# Altium PCB PCB1.PcbDoc
Units mm, origin at the board's own origin, x right, y up, seen from the top; angles counter-clockwise.
Board outline 100.28 x 100.25 mm, 2 copper layers (Top Layer, Bottom Layer); 197 components, 18 nets, 472 pads, 90 vias.
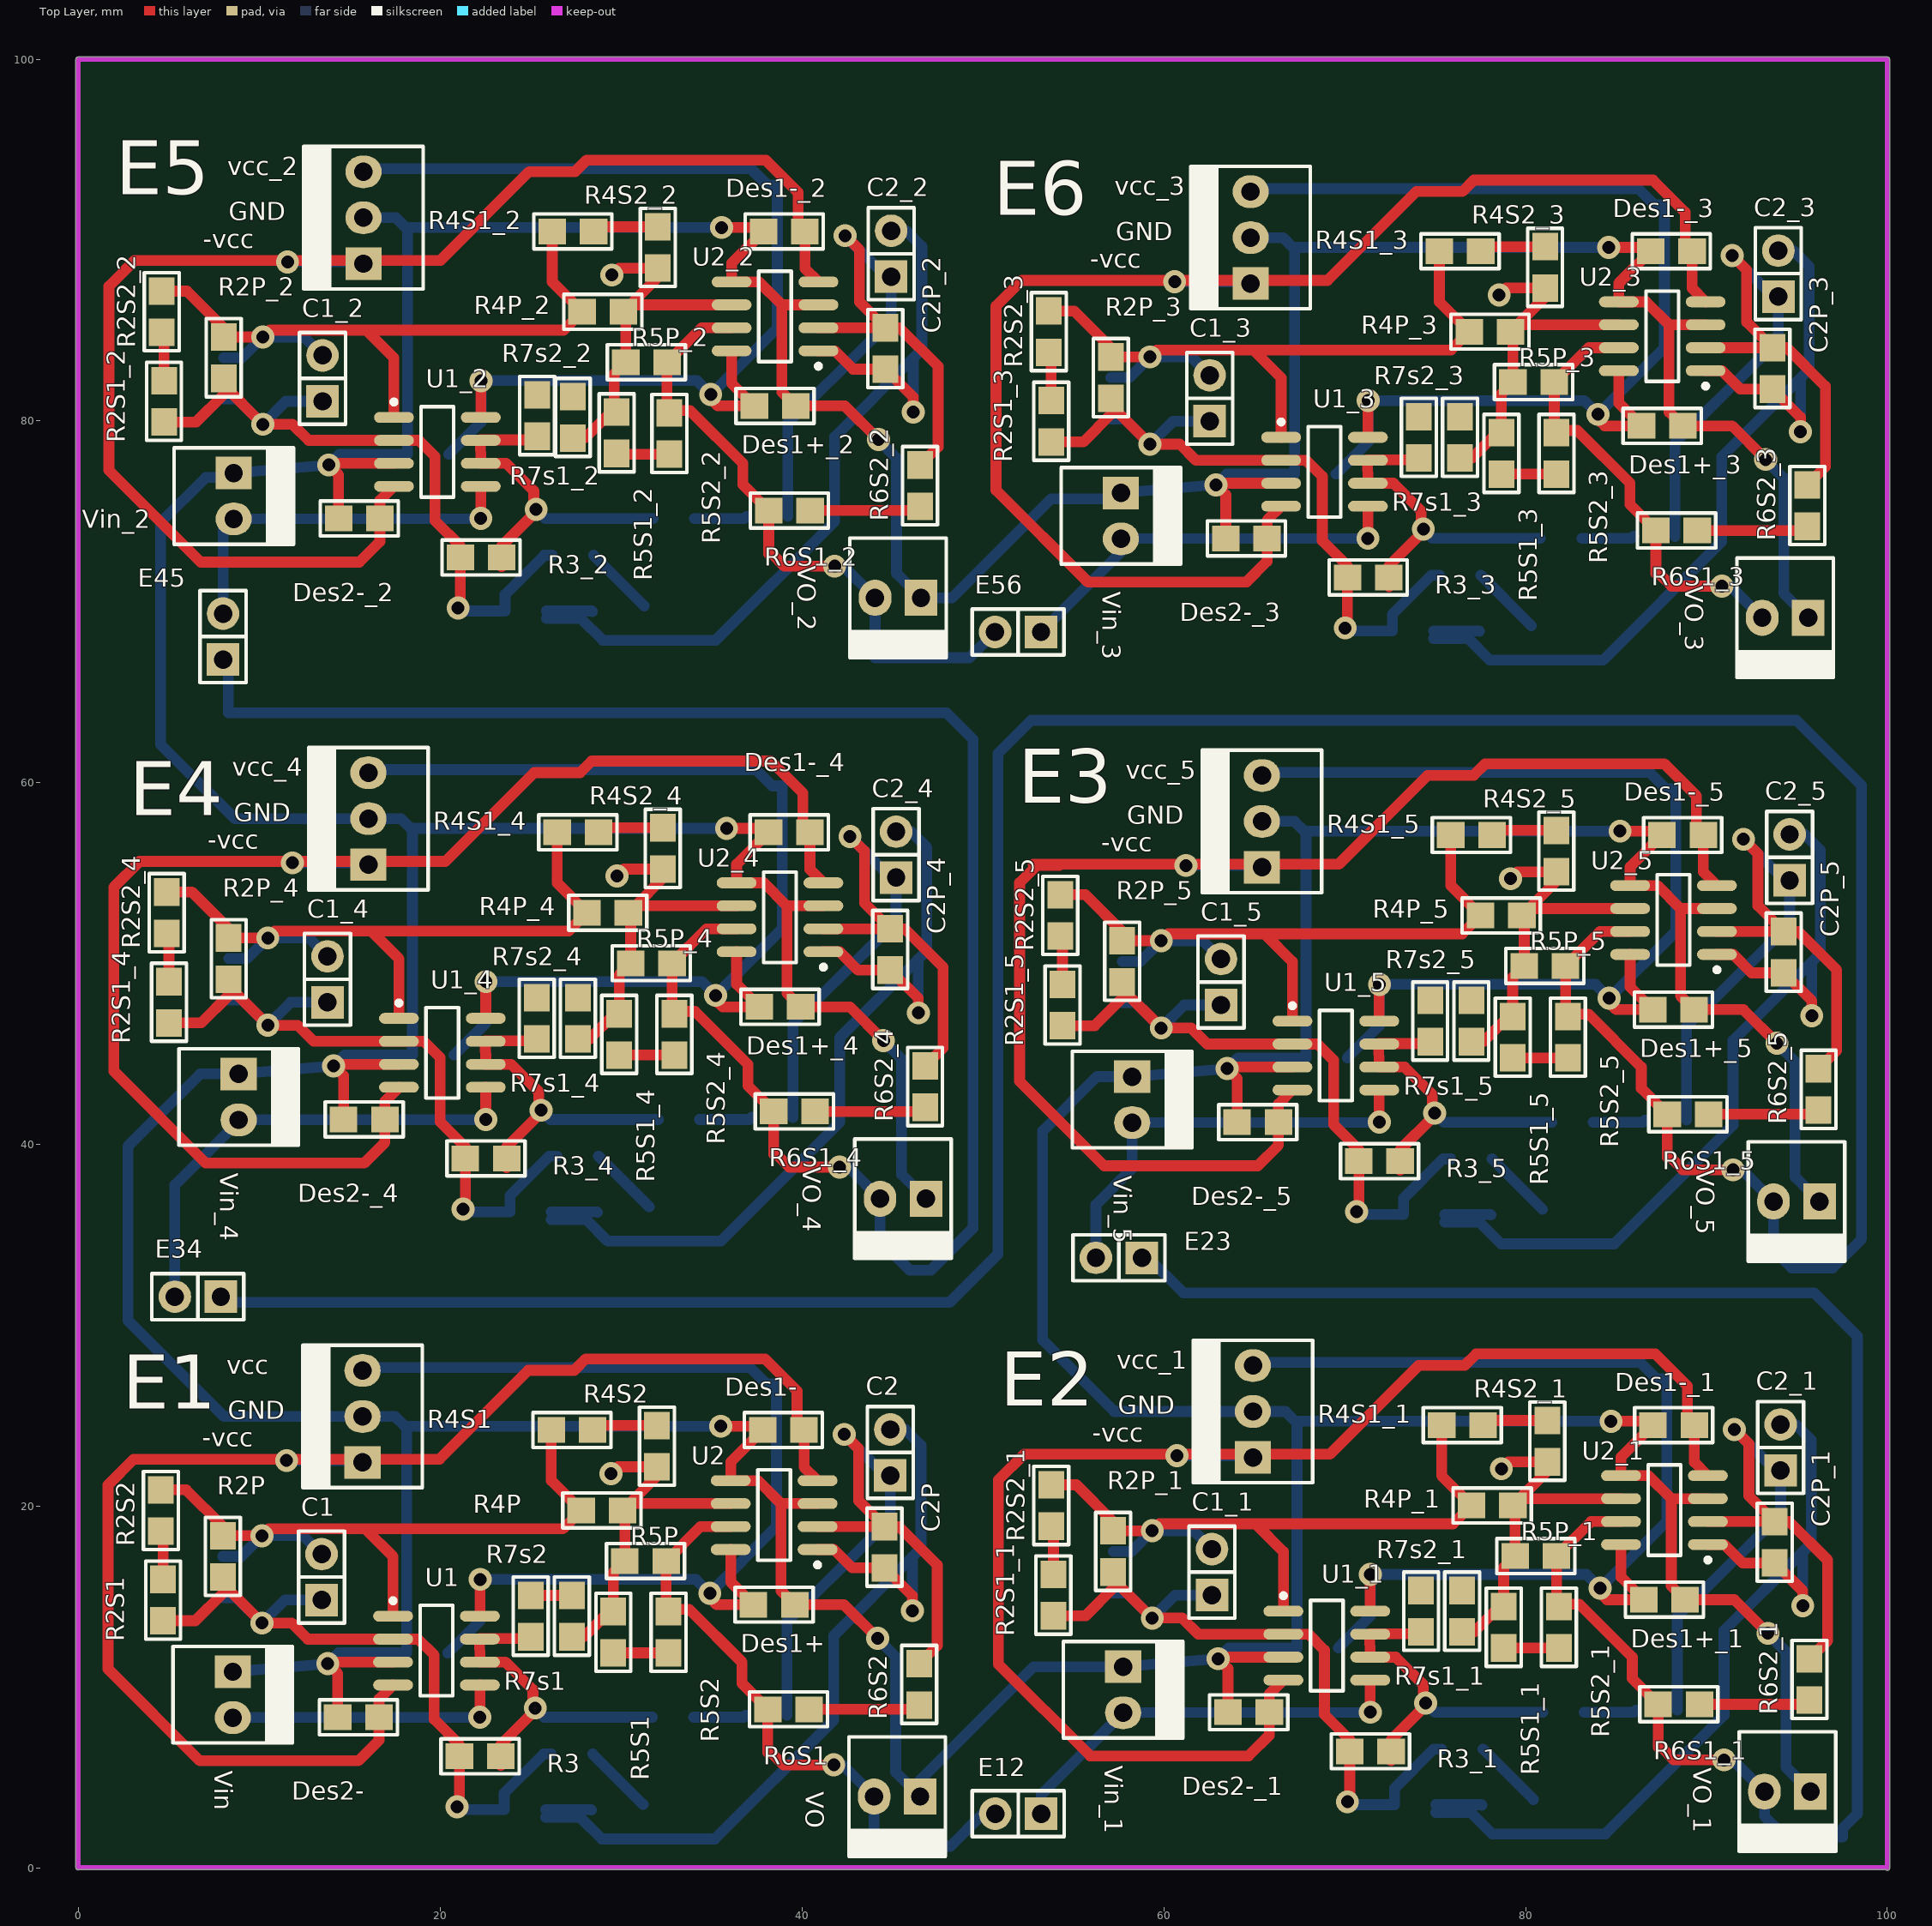
[diagram p0: Top Layer view]
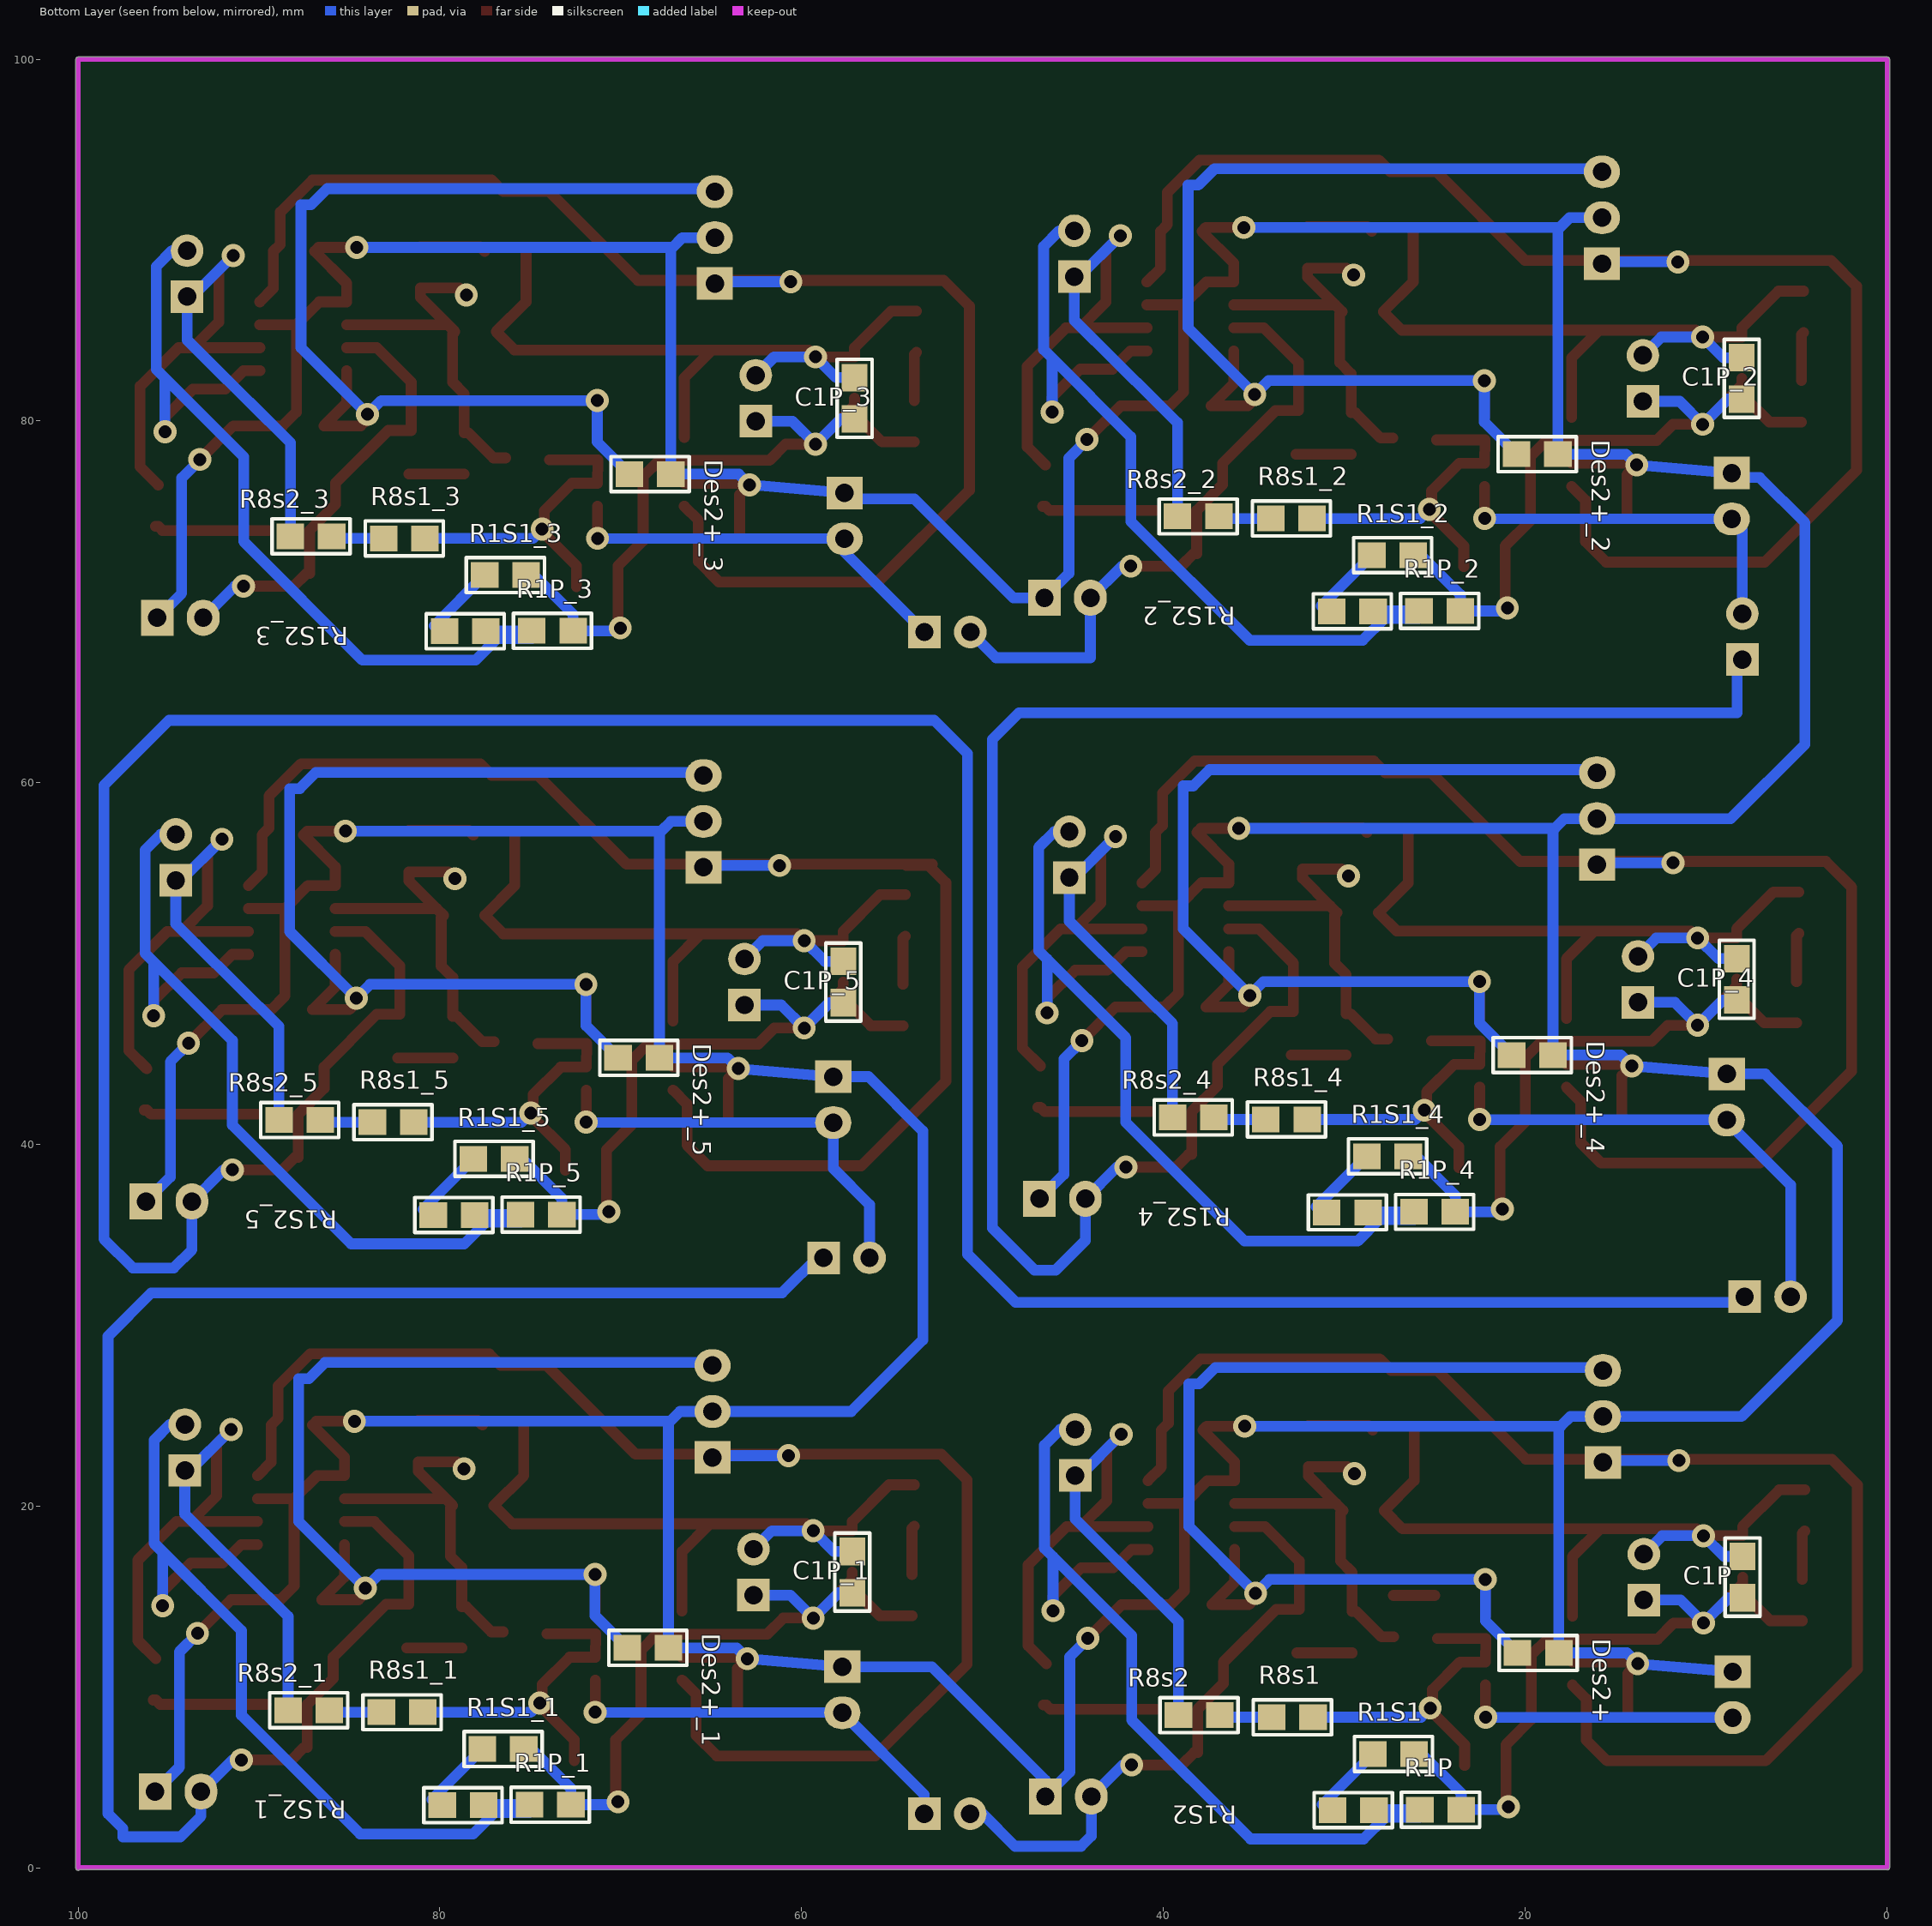
[diagram p1: Bottom Layer view, seen from below]
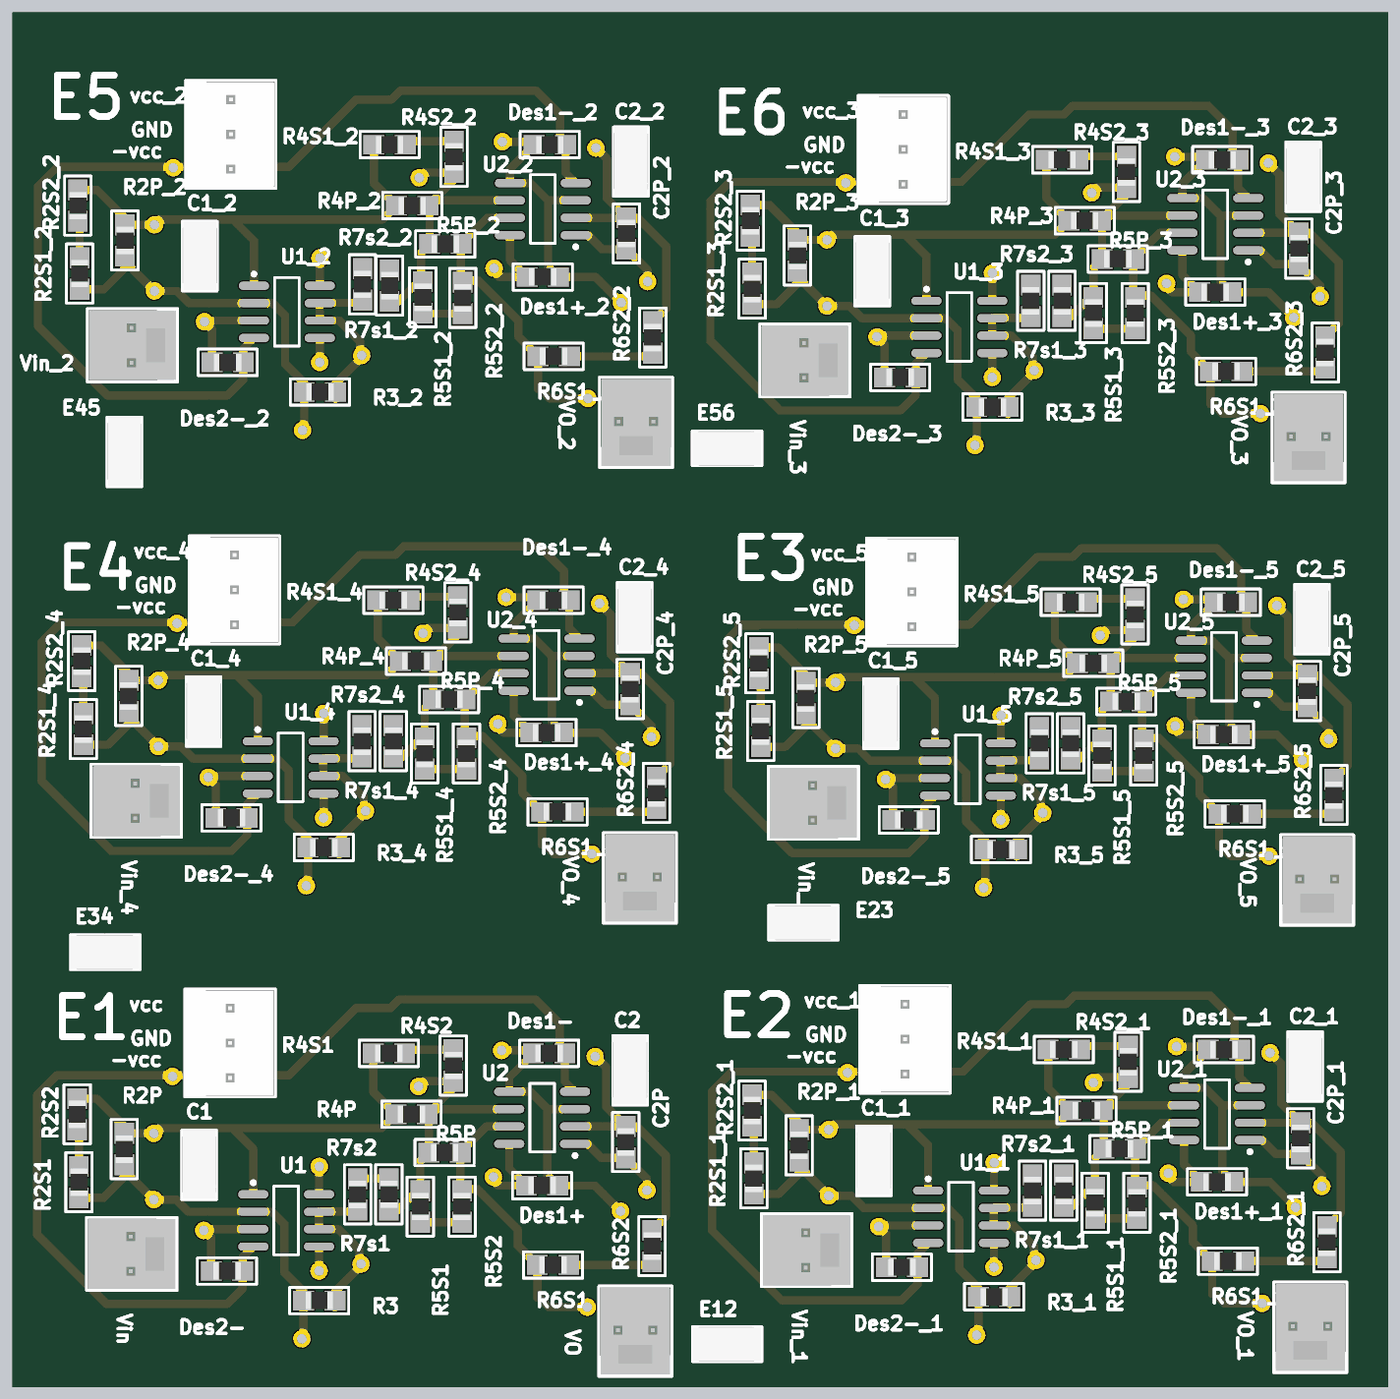
[diagram p2: 3D render of the assembled board from above, using the file's embedded part models]
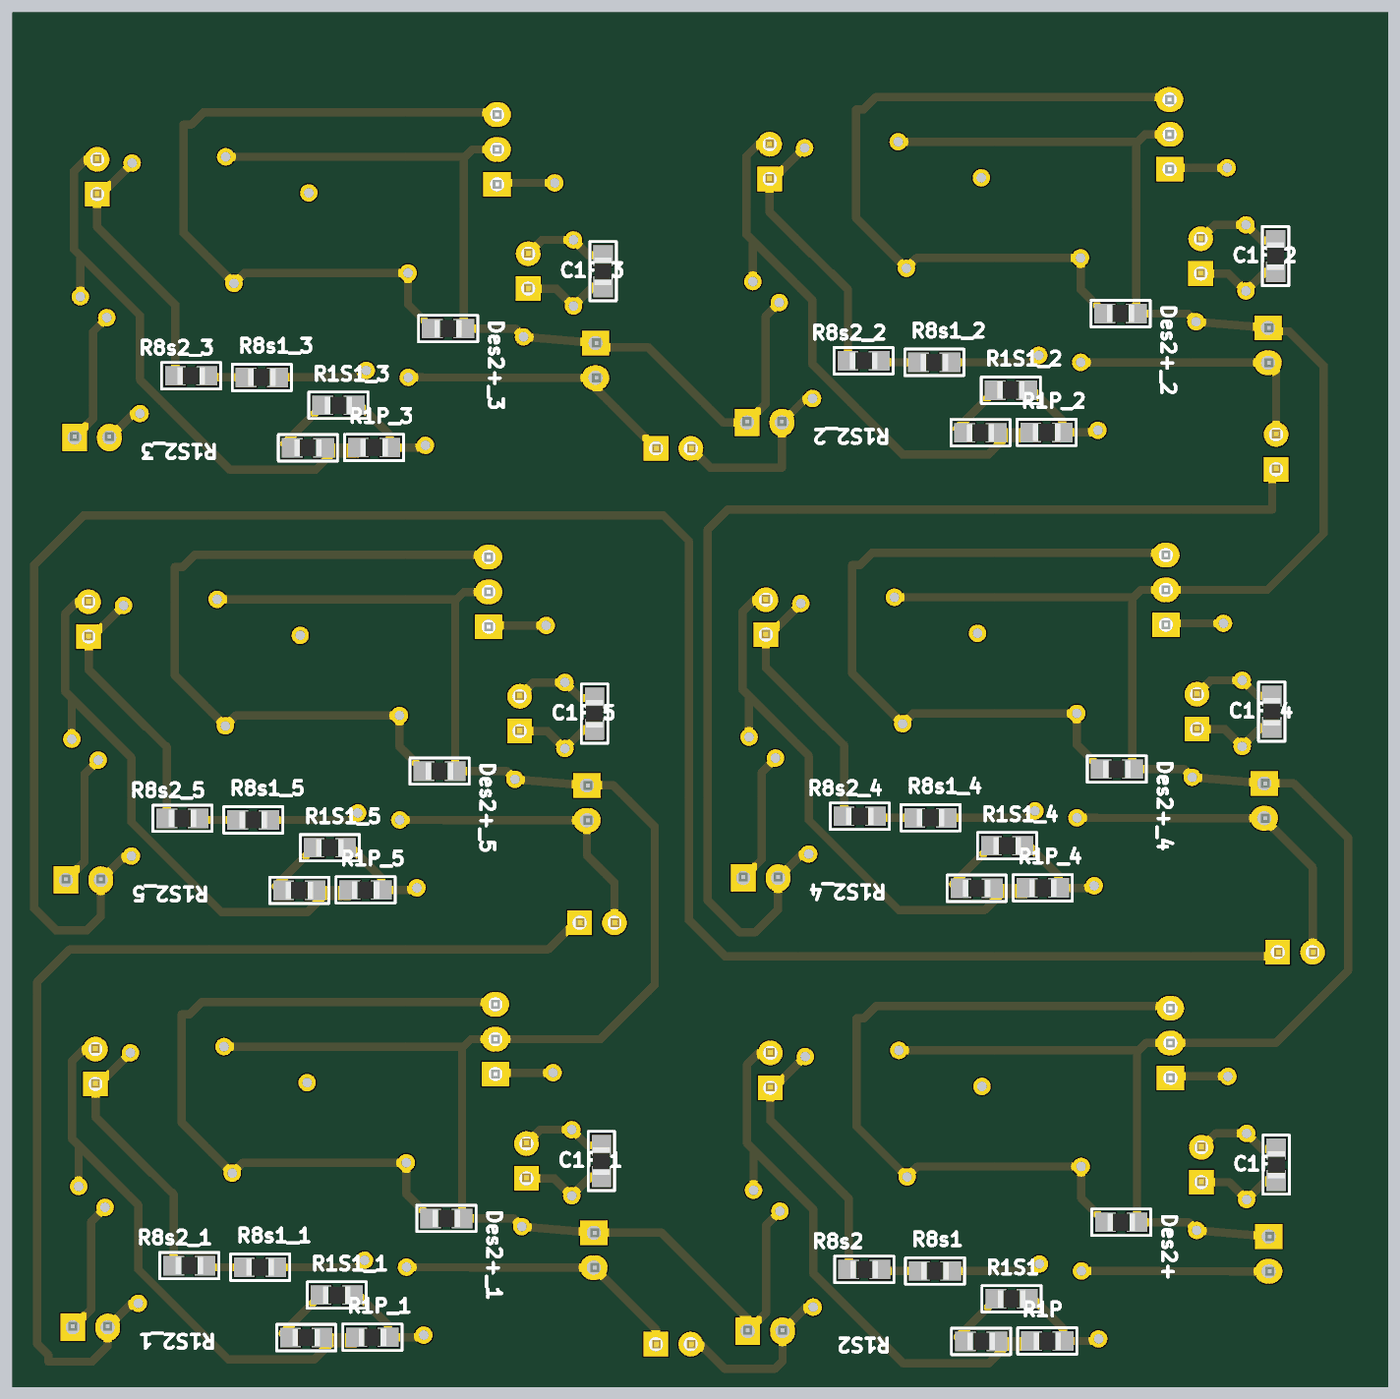
[diagram p3: 3D render of the assembled board from below, using the file's embedded part models]

## Layer stack, top to bottom
Top Solder: solder mask 0.0102, Solder Resist, Dk 3.5
Top Layer: signal copper 0.0356
Dielectric 1: dielectric 0.32, FR-4, Dk 4.8
Bottom Layer: signal copper 0.0356
Bottom Solder: solder mask 0.0102, Solder Resist, Dk 3.5

## Board outline
-0.152,0.025 -0.152,100 cw(c-0.025,100) -0.025,100.127 100,100.127 cw(c100,100) 100.127,100 100.127,0 cw(c100,0) 99.918,-0.097 0.03,-0.097 cw(c0.03,0.03) 0.013,-0.096 cw(c-0.025,0.025)

## Design rules (kind name [scope] priority, off if disabled: settings)
Clearance [All] p1: gap=0.254
PolygonConnect [All] p1: connectstyle=Relief reliefconductorwidth=0.254 reliefentries=4 polygonreliefangle="90 Angle" airgapwidth=0.254
RoutingVias [All] p1: holewidth=0.711 width=1.27 viastyle="Through Hole" minholewidth=0.711 minwidth=1.27 maxholewidth=0.711 maxwidth=1.27
SolderMaskExpansion [All] p1: expansion=0.102
Width [All] p1: maxlimit=0.6 minlimit=0.3 preferedwidth=0.4
30 further rules are at their usual default settings.

## Classes and differential pairs
component class Sheet1: C1 C1P C2 C2P Des1+ Des1- Des2+ Des2- R1P R1S1 R1S2 R2P R2S1 R2S2 R3 R4P R4S1 R4S2 R5P R5S1 R5S2 R6S1 R6S2 R7s1 R7s2 R8s1 R8s2 U1 U2 vcc Vin VO

## Components (designator, comment, footprint, x,y, rotation, side; value= is the part's Value field where it differs from the comment)
C1 "JUMPER" JUMPER2 13.436,16.083 r90 top
C1_1 "JUMPER" JUMPER2 62.661,16.358 r90 top (schematic designator C1)
C1_2 "JUMPER" JUMPER2 13.486,82.358 r90 top (schematic designator C1)
C1_3 "JUMPER" JUMPER2 62.536,81.258 r90 top (schematic designator C1)
C1_4 "JUMPER" JUMPER2 13.761,49.133 r90 top (schematic designator C1)
C1_5 "JUMPER" JUMPER2 63.161,48.983 r90 top (schematic designator C1)
C1P "CAP" 0805 7.975,16.083 r90 bottom
C1P_1 "CAP" 0805 57.2,16.358 r90 bottom (schematic designator C1P)
C1P_2 "CAP" 0805 8.025,82.358 r90 bottom (schematic designator C1P)
C1P_3 "CAP" 0805 57.075,81.258 r90 bottom (schematic designator C1P)
C1P_4 "CAP" 0805 8.3,49.133 r90 bottom (schematic designator C1P)
C1P_5 "CAP" 0805 57.7,48.983 r90 bottom (schematic designator C1P)
C2 "JUMPER" JUMPER2 44.875,22.975 r90 top
C2_1 "JUMPER" JUMPER2 94.1,23.25 r90 top (schematic designator C2)
C2_2 "JUMPER" JUMPER2 44.925,89.25 r90 top (schematic designator C2)
C2_3 "JUMPER" JUMPER2 93.975,88.15 r90 top (schematic designator C2)
C2_4 "JUMPER" JUMPER2 45.2,56.025 r90 top (schematic designator C2)
C2_5 "JUMPER" JUMPER2 94.6,55.875 r90 top (schematic designator C2)
C2P "CAP" 0805 44.551,17.734 r270 top
C2P_1 "CAP" 0805 93.776,18.009 r270 top (schematic designator C2P)
C2P_2 "CAP" 0805 44.601,84.009 r270 top (schematic designator C2P)
C2P_3 "CAP" 0805 93.651,82.909 r270 top (schematic designator C2P)
C2P_4 "CAP" 0805 44.876,50.784 r270 top (schematic designator C2P)
C2P_5 "CAP" 0805 94.276,50.634 r270 top (schematic designator C2P)
Des1+ "10n" 0805 38.455,14.559 r0 top
Des1+_1 "10n" 0805 87.68,14.834 r0 top (schematic designator Des1+)
Des1+_2 "10n" 0805 38.505,80.834 r0 top (schematic designator Des1+)
Des1+_3 "10n" 0805 87.555,79.734 r0 top (schematic designator Des1+)
Des1+_4 "10n" 0805 38.78,47.609 r0 top (schematic designator Des1+)
Des1+_5 "10n" 0805 88.18,47.459 r0 top (schematic designator Des1+)
Des1- "10n" 0805 38.963,24.211 r180 top
Des1-_1 "10n" 0805 88.188,24.486 r180 top (schematic designator Des1-)
Des1-_2 "10n" 0805 39.013,90.486 r180 top (schematic designator Des1-)
Des1-_3 "10n" 0805 88.063,89.386 r180 top (schematic designator Des1-)
Des1-_4 "10n" 0805 39.288,57.261 r180 top (schematic designator Des1-)
Des1-_5 "10n" 0805 88.688,57.111 r180 top (schematic designator Des1-)
Des2+ "10n" 0805 19.278,11.892 r180 bottom
Des2+_1 "10n" 0805 68.503,12.167 r180 bottom (schematic designator Des2+)
Des2+_2 "10n" 0805 19.328,78.167 r180 bottom (schematic designator Des2+)
Des2+_3 "10n" 0805 68.378,77.067 r180 bottom (schematic designator Des2+)
Des2+_4 "10n" 0805 19.603,44.942 r180 bottom (schematic designator Des2+)
Des2+_5 "10n" 0805 69.003,44.792 r180 bottom (schematic designator Des2+)
Des2- "10n" 0805 15.468,8.336 r180 top
Des2-_1 "10n" 0805 64.693,8.611 r180 top (schematic designator Des2-)
Des2-_2 "10n" 0805 15.518,74.611 r180 top (schematic designator Des2-)
Des2-_3 "10n" 0805 64.568,73.511 r180 top (schematic designator Des2-)
Des2-_4 "10n" 0805 15.793,41.386 r180 top (schematic designator Des2-)
Des2-_5 "10n" 0805 65.193,41.236 r180 top (schematic designator Des2-)
E12 "JUMPER" JUMPER2 51.95,3 r180 top (schematic designator C1)
E23 "JUMPER" JUMPER2 57.517,33.736 r180 top (schematic designator C1)
E34 "JUMPER" JUMPER2 6.592,31.586 r180 top (schematic designator C1)
E45 "JUMPER" JUMPER2 7.986,68.083 r90 top (schematic designator C1)
E56 "JUMPER" JUMPER2 51.942,68.336 r180 top (schematic designator C1)
R1P "270" 0805 24.675,3.225 r0 bottom
R1P_1 "270" 0805 73.9,3.5 r0 bottom (schematic designator R1P)
R1P_2 "270" 0805 24.725,69.5 r0 bottom (schematic designator R1P)
R1P_3 "270" 0805 73.775,68.4 r0 bottom (schematic designator R1P)
R1P_4 "270" 0805 25,36.275 r0 bottom (schematic designator R1P)
R1P_5 "270" 0805 74.4,36.125 r0 bottom (schematic designator R1P)
R1S1 "220" 0805 27.279,6.304 r0 bottom
R1S1_1 "220" 0805 76.504,6.579 r0 bottom (schematic designator R1S1)
R1S1_2 "220" 0805 27.329,72.579 r0 bottom (schematic designator R1S1)
R1S1_3 "220" 0805 76.379,71.479 r0 bottom (schematic designator R1S1)
R1S1_4 "220" 0805 27.604,39.354 r0 bottom (schematic designator R1S1)
R1S1_5 "220" 0805 77.004,39.204 r0 bottom (schematic designator R1S1)
R1S2 "RES" 0805 29.5,3.2 r180 bottom
R1S2_1 "RES" 0805 78.725,3.475 r180 bottom (schematic designator R1S2)
R1S2_2 "RES" 0805 29.55,69.475 r180 bottom (schematic designator R1S2)
R1S2_3 "RES" 0805 78.6,68.375 r180 bottom (schematic designator R1S2)
R1S2_4 "RES" 0805 29.825,36.25 r180 bottom (schematic designator R1S2)
R1S2_5 "RES" 0805 79.225,36.1 r180 bottom (schematic designator R1S2)
R2P "RES" 0805 7.975,17.226 r90 top
R2P_1 "RES" 0805 57.2,17.501 r90 top (schematic designator R2P)
R2P_2 "RES" 0805 8.025,83.501 r90 top (schematic designator R2P)
R2P_3 "RES" 0805 57.075,82.401 r90 top (schematic designator R2P)
R2P_4 "RES" 0805 8.3,50.276 r90 top (schematic designator R2P)
R2P_5 "RES" 0805 57.7,50.126 r90 top (schematic designator R2P)
R2S1 "1.5K" 0805 4.673,14.813 r90 top
R2S1_1 "1.5K" 0805 53.898,15.088 r90 top (schematic designator R2S1)
R2S1_2 "1.5K" 0805 4.723,81.088 r90 top (schematic designator R2S1)
R2S1_3 "1.5K" 0805 53.773,79.988 r90 top (schematic designator R2S1)
R2S1_4 "1.5K" 0805 4.998,47.863 r90 top (schematic designator R2S1)
R2S1_5 "1.5K" 0805 54.398,47.713 r90 top (schematic designator R2S1)
R2S2 "47" 0805 4.546,19.766 r90 top
R2S2_1 "47" 0805 53.771,20.041 r90 top (schematic designator R2S2)
R2S2_2 "47" 0805 4.596,86.041 r90 top (schematic designator R2S2)
R2S2_3 "47" 0805 53.646,84.941 r90 top (schematic designator R2S2)
R2S2_4 "47" 0805 4.871,52.816 r90 top (schematic designator R2S2)
R2S2_5 "47" 0805 54.271,52.666 r90 top (schematic designator R2S2)
R3 "47K" 0805 22.199,6.177 r180 top
R3_1 "47K" 0805 71.424,6.452 r180 top (schematic designator R3)
R3_2 "47K" 0805 22.249,72.452 r180 top (schematic designator R3)
R3_3 "47K" 0805 71.299,71.352 r180 top (schematic designator R3)
R3_4 "47K" 0805 22.524,39.227 r180 top (schematic designator R3)
R3_5 "47K" 0805 71.924,39.077 r180 top (schematic designator R3)
R4P "RES" 0805 28.93,19.766 r0 top
R4P_1 "RES" 0805 78.155,20.041 r0 top (schematic designator R4P)
R4P_2 "RES" 0805 28.98,86.041 r0 top (schematic designator R4P)
R4P_3 "RES" 0805 78.03,84.941 r0 top (schematic designator R4P)
R4P_4 "RES" 0805 29.255,52.816 r0 top (schematic designator R4P)
R4P_5 "RES" 0805 78.655,52.666 r0 top (schematic designator R4P)
R4S1 "1.5K" 0805 27.279,24.211 r0 top
R4S1_1 "1.5K" 0805 76.504,24.486 r0 top (schematic designator R4S1)
R4S1_2 "1.5K" 0805 27.329,90.486 r0 top (schematic designator R4S1)
R4S1_3 "1.5K" 0805 76.379,89.386 r0 top (schematic designator R4S1)
R4S1_4 "1.5K" 0805 27.604,57.261 r0 top (schematic designator R4S1)
R4S1_5 "1.5K" 0805 77.004,57.111 r0 top (schematic designator R4S1)
R4S2 "47" 0805 31.978,23.322 r270 top
R4S2_1 "47" 0805 81.203,23.597 r270 top (schematic designator R4S2)
R4S2_2 "47" 0805 32.028,89.597 r270 top (schematic designator R4S2)
R4S2_3 "47" 0805 81.078,88.497 r270 top (schematic designator R4S2)
R4S2_4 "47" 0805 32.303,56.372 r270 top (schematic designator R4S2)
R4S2_5 "47" 0805 81.703,56.222 r270 top (schematic designator R4S2)
R5P "RES" 0805 31.343,16.972 r0 top
R5P_1 "RES" 0805 80.568,17.247 r0 top (schematic designator R5P)
R5P_2 "RES" 0805 31.393,83.247 r0 top (schematic designator R5P)
R5P_3 "RES" 0805 80.443,82.147 r0 top (schematic designator R5P)
R5P_4 "RES" 0805 31.668,50.022 r0 top (schematic designator R5P)
R5P_5 "RES" 0805 81.068,49.872 r0 top (schematic designator R5P)
R5S1 "1.2K" 0805 29.565,13.035 r270 top
R5S1_1 "1.2K" 0805 78.79,13.31 r270 top (schematic designator R5S1)
R5S1_2 "1.2K" 0805 29.75,79.35 r270 top (schematic designator R5S1)
R5S1_3 "1.2K" 0805 78.665,78.21 r270 top (schematic designator R5S1)
R5S1_4 "1.2K" 0805 29.89,46.085 r270 top (schematic designator R5S1)
R5S1_5 "1.2K" 0805 79.29,45.935 r270 top (schematic designator R5S1)
R5S2 "33K" 0805 32.613,13.035 r90 top
R5S2_1 "33K" 0805 81.838,13.31 r90 top (schematic designator R5S2)
R5S2_2 "33K" 0805 32.663,79.31 r90 top (schematic designator R5S2)
R5S2_3 "33K" 0805 81.713,78.21 r90 top (schematic designator R5S2)
R5S2_4 "33K" 0805 32.938,46.085 r90 top (schematic designator R5S2)
R5S2_5 "33K" 0805 82.338,45.935 r90 top (schematic designator R5S2)
R6S1 "RES" 0805 39.25,8.775 r0 top
R6S1_1 "RES" 0805 88.475,9.05 r0 top (schematic designator R6S1)
R6S1_2 "RES" 0805 39.3,75.05 r0 top (schematic designator R6S1)
R6S1_3 "RES" 0805 88.35,73.95 r0 top (schematic designator R6S1)
R6S1_4 "RES" 0805 39.575,41.825 r0 top (schematic designator R6S1)
R6S1_5 "RES" 0805 88.975,41.675 r0 top (schematic designator R6S1)
R6S2 "56K" 0805 46.475,10.15 r90 top
R6S2_1 "56K" 0805 95.7,10.425 r90 top (schematic designator R6S2)
R6S2_2 "56K" 0805 46.525,76.425 r90 top (schematic designator R6S2)
R6S2_3 "56K" 0805 95.575,75.325 r90 top (schematic designator R6S2)
R6S2_4 "56K" 0805 46.8,43.2 r90 top (schematic designator R6S2)
R6S2_5 "56K" 0805 96.2,43.05 r90 top (schematic designator R6S2)
R7s1 "47K" 0805 25,13.925 r90 top
R7s1_1 "47K" 0805 74.225,14.2 r90 top (schematic designator R7s1)
R7s1_2 "47K" 0805 25.35,80.3 r90 top (schematic designator R7s1)
R7s1_3 "47K" 0805 74.1,79.1 r90 top (schematic designator R7s1)
R7s1_4 "47K" 0805 25.325,46.975 r90 top (schematic designator R7s1)
R7s1_5 "47K" 0805 74.725,46.825 r90 top (schematic designator R7s1)
R7s2 "RES" 0805 27.275,13.925 r270 top
R7s2_1 "RES" 0805 76.5,14.2 r270 top (schematic designator R7s2)
R7s2_2 "RES" 0805 27.325,80.2 r270 top (schematic designator R7s2)
R7s2_3 "RES" 0805 76.375,79.1 r270 top (schematic designator R7s2)
R7s2_4 "RES" 0805 27.6,46.975 r270 top (schematic designator R7s2)
R7s2_5 "RES" 0805 77,46.825 r270 top (schematic designator R7s2)
R8s1 "47K" 0805 32.867,8.336 r0 bottom
R8s1_1 "47K" 0805 82.092,8.611 r0 bottom (schematic designator R8s1)
R8s1_2 "47K" 0805 32.917,74.611 r0 bottom (schematic designator R8s1)
R8s1_3 "47K" 0805 81.967,73.511 r0 bottom (schematic designator R8s1)
R8s1_4 "47K" 0805 33.192,41.386 r0 bottom (schematic designator R8s1)
R8s1_5 "47K" 0805 82.592,41.236 r0 bottom (schematic designator R8s1)
R8s2 "RES" 0805 38.025,8.45 r0 bottom
R8s2_1 "RES" 0805 87.25,8.725 r0 bottom (schematic designator R8s2)
R8s2_2 "RES" 0805 38.075,74.725 r0 bottom (schematic designator R8s2)
R8s2_3 "RES" 0805 87.125,73.625 r0 bottom (schematic designator R8s2)
R8s2_4 "RES" 0805 38.35,41.5 r0 bottom (schematic designator R8s2)
R8s2_5 "RES" 0805 87.75,41.35 r0 bottom (schematic designator R8s2)
U1 "TL082CM" M08A_N 19.786,12.019 r0 top
U1_1 "TL082CM" M08A_N 69.011,12.294 r0 top (schematic designator U1)
U1_2 "TL082CM" M08A_N 19.836,78.294 r0 top (schematic designator U1)
U1_3 "TL082CM" M08A_N 68.886,77.194 r0 top (schematic designator U1)
U1_4 "TL082CM" M08A_N 20.111,45.069 r0 top (schematic designator U1)
U1_5 "TL082CM" M08A_N 69.511,44.919 r0 top (schematic designator U1)
U2 "TL082CM" M08A_N 38.455,19.512 r180 top
U2_1 "TL082CM" M08A_N 87.68,19.787 r180 top (schematic designator U2)
U2_2 "TL082CM" M08A_N 38.505,85.787 r180 top (schematic designator U2)
U2_3 "TL082CM" M08A_N 87.555,84.687 r180 top (schematic designator U2)
U2_4 "TL082CM" M08A_N 38.78,52.562 r180 top (schematic designator U2)
U2_5 "TL082CM" M08A_N 88.18,52.412 r180 top (schematic designator U2)
vcc "MOLEX3" MOLEX3 15.7,22.425 r90 top
vcc_1 "MOLEX3" MOLEX3 64.925,22.7 r90 top (schematic designator vcc)
vcc_2 "MOLEX3" MOLEX3 15.75,88.7 r90 top (schematic designator vcc)
vcc_3 "MOLEX3" MOLEX3 64.8,87.6 r90 top (schematic designator vcc)
vcc_4 "MOLEX3" MOLEX3 16.025,55.475 r90 top (schematic designator vcc)
vcc_5 "MOLEX3" MOLEX3 65.425,55.325 r90 top (schematic designator vcc)
Vin "MOLEX2" MOLEX2 8.525,10.85 r270 top (schematic designator B1)
Vin_1 "MOLEX2" MOLEX2 57.75,11.125 r270 top (schematic designator B1)
Vin_2 "MOLEX2" MOLEX2 8.575,77.125 r270 top (schematic designator B1)
Vin_3 "MOLEX2" MOLEX2 57.625,76.025 r270 top (schematic designator B1)
Vin_4 "MOLEX2" MOLEX2 8.85,43.9 r270 top (schematic designator B1)
Vin_5 "MOLEX2" MOLEX2 58.25,43.75 r270 top (schematic designator B1)
VO "MOLEX2" MOLEX2 46.525,3.95 r180 top (schematic designator B2)
VO_1 "MOLEX2" MOLEX2 95.75,4.225 r180 top (schematic designator B2)
VO_2 "MOLEX2" MOLEX2 46.575,70.225 r180 top (schematic designator B2)
VO_3 "MOLEX2" MOLEX2 95.625,69.125 r180 top (schematic designator B2)
VO_4 "MOLEX2" MOLEX2 46.85,37 r180 top (schematic designator B2)
VO_5 "MOLEX2" MOLEX2 96.25,36.85 r180 top (schematic designator B2)

## Footprints (in the part's own frame and the unit in brackets; to place one, negate y for a bottom-side part, rotate by r counter-clockwise, add the part's x,y. Pads: shape width x height; smd on the part's side, far side on the other; paste and mask are expansions set on the pad)
0805 [mil] "Pasivo 0805"
  rect 60x56 smd: 1(-45,0) 2(45,0)
  silkscreen extent -85,-38 85,38, body extent -39,-25 39,25, height 15
JUMPER2 [mm]
  rect 1.8x1.8 hole 1.016: 1(-1.27,0)
  round 1.8 hole 1.016: 2(1.27,0)
  silkscreen extent -2.54,-1.27 2.54,1.27, body extent -2.46,-1.27 2.54,1.27, height 9.5
M08A_N [mm] "SOIC, 8-Leads, Body 4.9x3.9mm, Pitch 1.27mm, IPC Medium Density"
  oval 2.2x0.6 smd: 1(-2.4,1.905) 2(-2.4,0.635) 3(-2.4,-0.635) 4(-2.4,-1.905) 5(2.4,-1.905) 6(2.4,-0.635) 7(2.4,0.635) 8(2.4,1.905)
  silkscreen extent -2.52,-2.5 0.9,2.88, body extent -2,-2.5 2,2.5, height 1.75
MOLEX2 [mm]
  rect 1.8x2 hole 1.016: 1(0,0)
  oval 1.8x2 hole 1.016: 2(2.54,0)
  silkscreen extent -1.4,-3.3 3.94,3.3, body extent -1.27,-3.18 3.81,3.18, height 10.74
MOLEX3 [mm]
  rect 1.8x2 hole 1.016: 1(0,0)
  oval 1.8x2 hole 1.016: 2(2.54,0) 3(5.08,0)
  silkscreen extent -1.4,-3.3 6.48,3.3, body extent -1.27,-3.17 6.35,3.18, height 10.74

## Part data
Des1+ Des1+_1 Des1+_2 Des1+_3 Des1+_4 Des1+_5 Des1- Des1-_1 Des1-_2 Des1-_3 Des1-_4 Des1-_5 Des2+ Des2+_1 Des2+_2 Des2+_3 Des2+_4 Des2+_5 Des2- Des2-_1 Des2-_2 Des2-_3 Des2-_4 Des2-_5: library part CAP
R1P R1P_1 R1P_2 R1P_3 R1P_4 R1P_5 R1S1 R1S1_1 R1S1_2 R1S1_3 R1S1_4 R1S1_5 R2S1 R2S1_1 R2S1_2 R2S1_3 R2S1_4 R2S1_5 R2S2 R2S2_1 R2S2_2 R2S2_3 R2S2_4 R2S2_5 R3 R3_1 R3_2 R3_3 R3_4 R3_5 R4S1 R4S1_1 R4S1_2 R4S1_3 R4S1_4 R4S1_5 R4S2 R4S2_1 R4S2_2 R4S2_3 R4S2_4 R4S2_5 R5S1 R5S1_1 R5S1_2 R5S1_3 R5S1_4 R5S1_5 R5S2 R5S2_1 R5S2_2 R5S2_3 R5S2_4 R5S2_5 R6S2 R6S2_1 R6S2_2 R6S2_3 R6S2_4 R6S2_5 R7s1 R7s1_1 R7s1_2 R7s1_3 R7s1_4 R7s1_5 R8s1 R8s1_1 R8s1_2 R8s1_3 R8s1_4 R8s1_5: library part RES
U1 U1_1 U1_2 U1_3 U1_4 U1_5 U2 U2_1 U2_2 U2_3 U2_4 U2_5: "Wide Bandwidth Dual JFET Input Operational Amplifier, 8-pin Narrow SOIC"

## Via types
v1: diameter 1.27, hole 0.711, Top Layer to Bottom Layer, 90 vias

## Nets (pads, with @x,y where several pads share a name; then routed paths per layer and width w, separated by ;. In a path a pad name is that pad's centre, name@x,y a point inside that pad or via, vN(x,y) a via of type N, cw(c..) or ccw(c..) an arc to the next point about the centre after c; other vN are vias at no path point)
-VCC: Des1-.1 Des2-.1 U1.4 U2.4 vcc.1 | length 82.4
  Top Layer w0.6: U1.4 16.611,9.339 Des2-.1 16.611,7.066 15.468,5.923 6.705,5.923 1.625,11.003 1.625,21.175 3.05,22.6 19.95,22.6 24.863,27.513 27.406,27.513 28.041,28.148 37.947,28.148 39.725,26.37 39.725,24.592 Des1-.1 40.106,22.166 U2.4
  Bottom Layer w0.6: v1(11.5,22.525) vcc.1@15.6,22.525
GND: Des1+.2 Des1-.2 Des2+.2 Des2-.2 U1.3 U2.3 U2.5 vcc.2 Vin.1 VO.1 | length 128.7
  Top Layer w0.6: v1(13.777,11.297) 14.325,10.749 Des2-.2 ; v1@13.864,11.384 U1.3 ; v1(35.5,24.425) 37.606,24.425 Des1-.2 36.055,22.446 U2.5 37.566,21.417 38.836,20.147 ; U2.3 38.836,20.147 ; v1(44.175,12.7) 42.316,14.559 Des1+.2 38.836,15.321 38.836,20.147
  Bottom Layer w0.6: Vin.1 v1(13.777,11.297) 14.372,11.892 Des2+.2 18.135,24.425 ; 8.85,43.9 6.725,43.9 2.725,39.9 2.725,30.275 8.035,24.965 vcc.2 17.495,24.965 18.035,24.425 18.135,24.425 ; v1(35.5,24.425) 18.135,24.425 ; v1(44.175,12.7) 44.175,12.675 45.175,11.675 45.175,5.3 VO.1 46.525,4.85 52.8,11.125 57.75,11.125
NetC1_1: C1.1 C1P.1 R1P.1 R1S1.1 R2P.1 R2S1.1 R3.2 U1.2 | length 40.3
  Top Layer w0.6: R2S1.1 6.451,13.67 7.975,15.194 ; R2P.1 7.975,15.702 v1(10.134,13.543) 11.785,13.543 12.674,12.654 U1.2 18.77,12.654 19.659,11.765 19.659,8.209 21.056,6.812 R3.2 21.056,3.51 v1(20.929,3.383)
  Bottom Layer w0.6: C1P.1 8.737,14.94 v1(10.134,13.543) 11.404,14.813 C1.1 ; v1(20.929,3.383) 21.087,3.225 R1P.1 23.532,4.132 25.704,6.304 R1S1.1
NetC1_2: C1.2 C1P.2 R2P.2 R2S2.2 R4P.1 R4S1.1 U1.1 | length 42.1
  Top Layer w0.6: R2S2.2 5.943,20.909 7.975,18.877 R2P.2 v1(10.134,18.369) 10.515,18.75 15.849,18.75 ; U1.1 17.386,17.213 15.849,18.75 ; R4S1.1 26.136,21.417 R4P.1 26.771,18.75 15.849,18.75
  Bottom Layer w0.6: C1P.2 8.991,17.226 v1(10.134,18.369) 12.42,18.369 C1.2
NetC2_1: C2.1 C2P.1 R6S2.2 R8s2.2 U2.2 | length 38.5
  Top Layer w0.6: U2.2 C2P.1 ; v1(42.325,23.975) 43.125,23.175 43.125,20.303 C2P.1 ; R6S2.2 47.475,12.293 47.475,16.75 45.348,18.877 C2P.1
  Bottom Layer w0.6: R8s2.2 39.168,13.634 43.76,18.183 44.875,19.298 C2.1 44.595,21.705 v1(42.325,23.975)
NetC2_2: C2.2 C2P.2 R1P.2 R1S2.2 U2.1 | length 51.1
  Top Layer w0.6: U2.1 41.757,17.607 42.773,16.591 C2P.2 46.1,15.042 v1(46.1,14.225)
  Bottom Layer w0.6: R1P.2@25.818,2.8 27.735,2.8 28.93,1.605 35.18,1.605 41.75,8.175 41.75,12.85 46.1,17.2 ; R1P.2 28.332,3.225 R1S2.2 ; C2.2 45.705,24.245 46.575,23.375 46.575,17.675 46.1,17.2 ; v1(46.1,14.225) 46.1,17.2
NetR1S1_2: R1S1.2 R1S2.1 | length 4
  Bottom Layer w0.6: R1S1.2 R1S2.1@31.216,3.51
NetR2S1_2: R2S1.2 R2S2.1 | length 2.7
  Top Layer w0.6: R2S2.1 4.673,18.496 R2S1.2
NetR4P_2: R4P.2 R4S2.2 R5P.1 R5S1.1 R7s2.2 U2.6 | length 20.3
  Top Layer w0.6: R7s2.2 27.932,12.782 29.328,14.178 R5S1.1 29.565,16.337 R5P.1 30.2,19.639 R4P.2 R4P.2@30.454,20.147 ; v1(29.438,21.798) 29.819,22.179 R4S2.2 31.978,21.671 R4P.2@30.454,20.147 ; U2.6 R4P.2@30.454,20.147
NetR4S1_2: R4S1.2 R4S2.1 | length 3.7
  Top Layer w0.6: R4S1.2 28.676,24.465 R4S2.1
NetR5S1_2: R5S1.2 R5S2.1 | length 3
  Top Layer w0.6: R5S1.2 R5S2.1
NetR6S1_2: R6S1.2 R6S2.1 | length 6.3
  Top Layer w0.6: R6S1.2 46.243,8.775 R6S2.1 R6S2.1@46.619,9.007
NetR7s1_2: R7s1.2 R7s2.1 | length 2.3
  Top Layer w0.6: R7s1.2 R7s2.1
NetR8s1_2: R8s1.2 R8s2.1 | length 2.9
  Bottom Layer w0.6: R8s1.2 36.768,8.336 R8s2.1
V1: R3.1 R7s1.1 R8s1.1 U1.6 U1.7 | length 19.2
  Top Layer w0.6: R3.1@23.342,5.669 23.342,6.812 25.12,8.59 25.12,9.86 23.596,11.384 U1.6 22.161,12.679 R7s1.1@24.85,12.679
  Bottom Layer w0.6: v1(25.247,8.844) 25.755,8.336 R8s1.1
VCC: Des1+.1 Des2+.1 U1.8 U2.8 vcc.3 | length 62.2
  Top Layer w0.6: U1.8 22.186,15.943 v1(22.199,15.956) ; v1@35.026,14.813 35.28,14.559 Des1+.1 36.055,15.816 U2.8
  Bottom Layer w0.6: vcc.3 15.87,27.675 37.125,27.675 38.025,26.775 38.582,26.775 38.582,18.877 v1(34.899,15.194) 34.137,15.956 v1(22.199,15.956) 22.199,13.67 Des2+.1
VI: U1.5 Vin.2 | length 15.4
  Top Layer w0.6: v1(22.186,8.336) U1.5
  Bottom Layer w0.6: Vin.2 v1(22.186,8.336)
VO: R5P.2 R5S2.2 R6S1.1 U2.7 VO.2 | length 24.4
  Top Layer w0.6: U2.7 34.391,18.877 R5P.2 32.486,14.305 33.756,14.305 36.677,11.384 36.677,10.205 R6S1.1 38.107,6.393 38.282,6.393 38.975,5.7 v1(41.75,5.7)
  Bottom Layer w0.6: v1@42.235,5.7 VO.2
pads on no net: C1_1.1 C1_1.2 C1_2.1 C1_2.2 C1_3.1 C1_3.2 C1_4.1 C1_4.2 C1_5.1 C1_5.2 C1P_1.1 C1P_1.2 C1P_2.1 C1P_2.2 C1P_3.1 C1P_3.2 C1P_4.1 C1P_4.2 C1P_5.1 C1P_5.2 C2_1.1 C2_1.2 C2_2.1 C2_2.2 C2_3.1 C2_3.2 C2_4.1 C2_4.2 C2_5.1 C2_5.2 C2P_1.1 C2P_1.2 C2P_2.1 C2P_2.2 C2P_3.1 C2P_3.2 C2P_4.1 C2P_4.2 C2P_5.1 C2P_5.2 Des1+_1.1 Des1+_1.2 Des1+_2.1 Des1+_2.2 Des1+_3.1 Des1+_3.2 Des1+_4.1 Des1+_4.2 Des1+_5.1 Des1+_5.2 Des1-_1.1 Des1-_1.2 Des1-_2.1 Des1-_2.2 Des1-_3.1 Des1-_3.2 Des1-_4.1 Des1-_4.2 Des1-_5.1 Des1-_5.2 Des2+_1.1 Des2+_1.2 Des2+_2.1 Des2+_2.2 Des2+_3.1 Des2+_3.2 Des2+_4.1 Des2+_4.2 Des2+_5.1 Des2+_5.2 Des2-_1.1 Des2-_1.2 Des2-_2.1 Des2-_2.2 Des2-_3.1 Des2-_3.2 Des2-_4.1 Des2-_4.2 Des2-_5.1 Des2-_5.2 E12.1 E12.2 E23.1 E23.2 E34.1 E34.2 E45.1 E45.2 E56.1 E56.2 R1P_1.1 R1P_1.2 R1P_2.1 R1P_2.2 R1P_3.1 R1P_3.2 R1P_4.1 R1P_4.2 R1P_5.1 R1P_5.2 R1S1_1.1 R1S1_1.2 R1S1_2.1 R1S1_2.2 R1S1_3.1 R1S1_3.2 R1S1_4.1 R1S1_4.2 R1S1_5.1 R1S1_5.2 R1S2_1.1 R1S2_1.2 R1S2_2.1 R1S2_2.2 R1S2_3.1 R1S2_3.2 R1S2_4.1 R1S2_4.2 R1S2_5.1 R1S2_5.2 R2P_1.1 R2P_1.2 R2P_2.1 R2P_2.2 R2P_3.1 R2P_3.2 R2P_4.1 R2P_4.2 R2P_5.1 R2P_5.2 R2S1_1.1 R2S1_1.2 R2S1_2.1 R2S1_2.2 R2S1_3.1 R2S1_3.2 R2S1_4.1 R2S1_4.2 R2S1_5.1 R2S1_5.2 R2S2_1.1 R2S2_1.2 R2S2_2.1 R2S2_2.2 R2S2_3.1 R2S2_3.2 R2S2_4.1 R2S2_4.2 R2S2_5.1 R2S2_5.2 R3_1.1 R3_1.2 R3_2.1 R3_2.2 R3_3.1 R3_3.2 R3_4.1 R3_4.2 R3_5.1 R3_5.2 R4P_1.1 R4P_1.2 R4P_2.1 R4P_2.2 R4P_3.1 R4P_3.2 R4P_4.1 R4P_4.2 R4P_5.1 R4P_5.2 R4S1_1.1 R4S1_1.2 R4S1_2.1 R4S1_2.2 R4S1_3.1 R4S1_3.2 R4S1_4.1 R4S1_4.2 R4S1_5.1 R4S1_5.2 R4S2_1.1 R4S2_1.2 R4S2_2.1 R4S2_2.2 R4S2_3.1 R4S2_3.2 R4S2_4.1 R4S2_4.2 R4S2_5.1 R4S2_5.2 R5P_1.1 R5P_1.2 R5P_2.1 R5P_2.2 R5P_3.1 R5P_3.2 R5P_4.1 R5P_4.2 R5P_5.1 R5P_5.2 R5S1_1.1 R5S1_1.2 R5S1_2.1 R5S1_2.2 R5S1_3.1 R5S1_3.2 R5S1_4.1 R5S1_4.2 R5S1_5.1 R5S1_5.2 R5S2_1.1 R5S2_1.2 R5S2_2.1 R5S2_2.2 R5S2_3.1 R5S2_3.2 R5S2_4.1 R5S2_4.2 R5S2_5.1 R5S2_5.2 R6S1_1.1 R6S1_1.2 R6S1_2.1 R6S1_2.2 R6S1_3.1 R6S1_3.2 R6S1_4.1 R6S1_4.2 R6S1_5.1 R6S1_5.2 R6S2_1.1 R6S2_1.2 R6S2_2.1 R6S2_2.2 R6S2_3.1 R6S2_3.2 R6S2_4.1 R6S2_4.2 R6S2_5.1 R6S2_5.2 R7s1_1.1 R7s1_1.2 R7s1_2.1 R7s1_2.2 R7s1_3.1 R7s1_3.2 R7s1_4.1 R7s1_4.2 R7s1_5.1 R7s1_5.2 R7s2_1.1 R7s2_1.2 R7s2_2.1 R7s2_2.2 R7s2_3.1 R7s2_3.2 R7s2_4.1 R7s2_4.2 R7s2_5.1 R7s2_5.2 R8s1_1.1 R8s1_1.2 R8s1_2.1 R8s1_2.2 R8s1_3.1 R8s1_3.2 R8s1_4.1 R8s1_4.2 R8s1_5.1 R8s1_5.2 R8s2_1.1 R8s2_1.2 R8s2_2.1 R8s2_2.2 R8s2_3.1 R8s2_3.2 R8s2_4.1 R8s2_4.2 R8s2_5.1 R8s2_5.2 U1_1.1 U1_1.2 U1_1.3 U1_1.4 U1_1.5 U1_1.6 U1_1.7 U1_1.8 U1_2.1 U1_2.2 U1_2.3 U1_2.4 U1_2.5 U1_2.6 U1_2.7 U1_2.8 U1_3.1 U1_3.2 U1_3.3 U1_3.4 U1_3.5 U1_3.6 U1_3.7 U1_3.8 U1_4.1 U1_4.2 U1_4.3 U1_4.4 U1_4.5 U1_4.6 U1_4.7 U1_4.8 U1_5.1 U1_5.2 U1_5.3 U1_5.4 U1_5.5 U1_5.6 U1_5.7 U1_5.8 U2_1.1 U2_1.2 U2_1.3 U2_1.4 U2_1.5 U2_1.6 U2_1.7 U2_1.8 U2_2.1 U2_2.2 U2_2.3 U2_2.4 U2_2.5 U2_2.6 U2_2.7 U2_2.8 U2_3.1 U2_3.2 U2_3.3 U2_3.4 U2_3.5 U2_3.6 U2_3.7 U2_3.8 U2_4.1 U2_4.2 U2_4.3 U2_4.4 U2_4.5 U2_4.6 U2_4.7 U2_4.8 U2_5.1 U2_5.2 U2_5.3 U2_5.4 U2_5.5 U2_5.6 U2_5.7 U2_5.8 vcc_1.1 vcc_1.2 vcc_1.3 vcc_2.1 vcc_2.2 vcc_2.3 vcc_3.1 vcc_3.2 vcc_3.3 vcc_4.1 vcc_4.2 vcc_4.3 vcc_5.1 vcc_5.2 vcc_5.3 Vin_1.1 Vin_1.2 Vin_2.1 Vin_2.2 Vin_3.1 Vin_3.2 Vin_4.1 Vin_4.2 Vin_5.1 Vin_5.2 VO_1.1 VO_1.2 VO_2.1 VO_2.2 VO_3.1 VO_3.2 VO_4.1 VO_4.2 VO_5.1 VO_5.2
copper on no net: | length 2946.3
  Top Layer w0.6: 4.596,84.898 4.723,84.771 4.723,82.231 ; 4.596,87.184 5.993,87.184 8.025,85.152 8.025,84.644 v1(10.184,84.644) 10.565,85.025 15.899,85.025 ; 4.723,79.945 6.501,79.945 8.025,81.469 ; 4.871,51.673 4.998,51.546 4.998,49.006 ; 4.871,53.959 6.268,53.959 8.3,51.927 8.3,51.419 v1(10.459,51.419) 10.84,51.8 16.174,51.8 ; 4.998,46.72 6.776,46.72 8.3,48.244 ; 8.025,82.358 8.025,81.977 v1(10.184,79.818) 11.835,79.818 12.724,78.929 17.436,78.929 18.82,78.929 19.709,78.04 19.709,74.484 21.106,73.087 21.106,72.452 21.106,69.785 v1(20.979,69.658) ; 8.3,49.133 8.3,48.752 v1(10.459,46.593) 12.11,46.593 12.999,45.704 17.711,45.704 19.095,45.704 19.984,44.815 19.984,41.259 21.381,39.862 21.381,39.227 21.381,36.56 v1(21.254,36.433) ; v1(13.827,77.572) 14.375,77.024 14.375,74.611 ; v1@13.914,77.659 17.436,77.659 ; v1(14.102,44.347) 14.65,43.799 14.65,41.386 ; v1@14.189,44.434 17.711,44.434 ; 17.436,76.389 16.661,75.614 16.661,74.611 16.661,73.341 15.518,72.198 6.755,72.198 1.675,77.278 1.675,87.45 3.1,88.875 20,88.875 24.913,93.788 27.456,93.788 28.091,94.423 37.997,94.423 39.775,92.645 39.775,90.867 40.156,90.486 40.156,88.441 40.905,87.692 ; 17.436,80.199 17.436,83.488 15.899,85.025 ; 17.711,43.164 16.936,42.389 16.936,41.386 16.936,40.116 15.793,38.973 7.03,38.973 1.95,44.053 1.95,54.225 3.375,55.65 20.275,55.65 25.188,60.563 27.731,60.563 28.366,61.198 38.272,61.198 40.05,59.42 40.05,57.642 40.431,57.261 40.431,55.216 41.18,54.467 ; 17.711,46.974 17.711,50.263 16.174,51.8 ; v1(22.236,74.611) 22.236,76.389 ; 22.236,80.199 22.236,82.218 v1(22.249,82.231) ; v1(22.511,41.386) 22.511,43.164 ; 22.511,46.974 22.511,48.993 v1(22.524,49.006) ; 23.392,71.944 23.392,73.087 25.17,74.865 25.17,76.135 23.646,77.659 22.236,77.659 22.211,78.954 24.9,78.954 ; 23.667,38.719 23.667,39.862 25.445,41.64 25.445,42.91 23.921,44.434 22.511,44.434 22.486,45.729 25.175,45.729 ; 26.186,90.486 26.186,87.692 27.837,86.041 26.821,85.025 15.899,85.025 ; 26.461,57.261 26.461,54.467 28.112,52.816 27.096,51.8 16.174,51.8 ; 27.325,79.057 27.982,79.057 29.378,80.453 29.615,80.453 29.615,82.612 30.25,83.247 30.25,85.914 30.123,86.041 30.504,86.422 ; 27.6,45.832 28.257,45.832 29.653,47.228 29.89,47.228 29.89,49.387 30.525,50.022 30.525,52.689 30.398,52.816 30.779,53.197 ; 28.472,90.486 28.726,90.74 32.028,90.74 ; 28.747,57.261 29.001,57.515 32.303,57.515 ; v1(29.488,88.073) 29.869,88.454 32.028,88.454 32.028,87.946 30.504,86.422 ; 29.615,78.167 32.663,78.167 ; v1(29.763,54.848) 30.144,55.229 32.303,55.229 32.303,54.721 30.779,53.197 ; 29.89,44.942 32.938,44.942 ; v1@35.076,81.088 35.33,80.834 37.362,80.834 36.105,82.091 36.105,83.882 ; v1@35.351,47.863 35.605,47.609 37.637,47.609 36.38,48.866 36.38,50.657 ; v1(35.55,90.7) 37.656,90.7 37.87,90.486 36.105,88.721 36.105,87.692 37.616,87.692 38.886,86.422 ; v1(35.825,57.475) 37.931,57.475 38.145,57.261 36.38,55.496 36.38,54.467 37.891,54.467 39.161,53.197 ; 36.105,85.152 34.441,85.152 32.536,83.247 32.536,80.58 33.806,80.58 36.727,77.659 36.727,76.48 38.157,75.05 38.157,72.668 38.332,72.668 39.025,71.975 v1(41.8,71.975) ; 36.105,86.422 30.504,86.422 ; 36.38,51.927 34.716,51.927 32.811,50.022 32.811,47.355 34.081,47.355 37.002,44.434 37.002,43.255 38.432,41.825 38.432,39.443 38.607,39.443 39.3,38.75 v1(42.075,38.75) ; 36.38,53.197 30.779,53.197 ; 40.443,75.05 46.293,75.05 46.525,75.282 46.669,75.282 ; 40.718,41.825 46.568,41.825 46.8,42.057 46.944,42.057 ; 40.905,83.882 41.807,83.882 42.823,82.866 44.601,82.866 46.15,81.317 v1(46.15,80.5) ; 40.905,85.152 44.601,85.152 ; 40.905,86.422 38.886,86.422 ; 41.18,50.657 42.082,50.657 43.098,49.641 44.876,49.641 46.425,48.092 v1(46.425,47.275) ; 41.18,51.927 44.876,51.927 ; 41.18,53.197 39.161,53.197 ; v1(42.375,90.25) 43.175,89.45 43.175,86.578 44.601,85.152 ; v1(42.65,57.025) 43.45,56.225 43.45,53.353 44.876,51.927 ; v1(44.225,78.975) 42.366,80.834 39.648,80.834 38.886,81.596 38.886,86.422 ; v1(44.5,45.75) 42.641,47.609 39.923,47.609 39.161,48.371 39.161,53.197 ; 46.525,77.568 47.525,78.568 47.525,83.025 45.398,85.152 44.601,85.152 ; 46.8,44.343 47.8,45.343 47.8,49.8 45.673,51.927 44.876,51.927 ; 52.775,55.5 69.675,55.5 74.588,60.413 77.131,60.413 77.766,61.048 87.672,61.048 89.45,59.27 89.45,57.492 89.831,57.111 89.831,55.066 90.58,54.317 ; 53.646,83.798 53.773,83.671 53.773,81.131 ; 53.646,86.084 55.043,86.084 57.075,84.052 57.075,83.544 v1(59.234,83.544) 59.615,83.925 64.949,83.925 ; 53.771,18.898 53.898,18.771 53.898,16.231 ; 53.771,21.184 55.168,21.184 57.2,19.152 57.2,18.644 v1(59.359,18.644) 59.74,19.025 65.074,19.025 ; 53.773,78.845 55.551,78.845 57.075,80.369 ; 53.898,13.945 55.676,13.945 57.2,15.469 ; 54.225,55.425 52.975,55.425 52.025,54.475 52.025,43.5 56.702,38.823 65.193,38.823 66.336,39.966 66.336,41.236 66.336,42.239 67.111,43.014 ; 54.271,51.523 54.398,51.396 54.398,48.856 ; 54.271,53.809 55.668,53.809 57.7,51.777 57.7,51.269 v1(59.859,51.269) 60.24,51.65 65.574,51.65 ; 54.398,46.57 56.176,46.57 57.7,48.094 ; 57.075,81.258 57.075,80.877 v1(59.234,78.718) 60.885,78.718 61.774,77.829 66.486,77.829 67.87,77.829 68.759,76.94 68.759,73.384 70.156,71.987 70.156,71.352 70.156,68.685 v1(70.029,68.558) ; 57.2,16.358 57.2,15.977 v1(59.359,13.818) 61.01,13.818 61.899,12.929 66.611,12.929 67.995,12.929 68.884,12.04 68.884,8.484 70.281,7.087 70.281,6.452 70.281,3.785 v1(70.154,3.658) ; 57.7,48.983 57.7,48.602 v1(59.859,46.443) 61.51,46.443 62.399,45.554 67.111,45.554 68.495,45.554 69.384,44.665 69.384,41.109 70.781,39.712 70.781,39.077 70.781,36.41 v1(70.654,36.283) ; v1(62.877,76.472) 63.425,75.924 63.425,73.511 ; v1@62.964,76.559 66.486,76.559 ; v1(63.002,11.572) 63.55,11.024 63.55,8.611 ; v1@63.089,11.659 66.611,11.659 ; v1(63.502,44.197) 64.05,43.649 64.05,41.236 ; v1@63.589,44.284 67.111,44.284 ; 66.486,75.289 65.711,74.514 65.711,73.511 65.711,72.241 64.568,71.098 55.805,71.098 50.725,76.178 50.725,86.35 52.15,87.775 69.05,87.775 73.963,92.688 76.506,92.688 77.141,93.323 87.047,93.323 88.825,91.545 88.825,89.767 89.206,89.386 89.206,87.341 89.955,86.592 ; 66.486,79.099 66.486,82.388 64.949,83.925 ; 66.611,10.389 65.836,9.614 65.836,8.611 65.836,7.341 64.693,6.198 55.93,6.198 50.85,11.278 50.85,21.45 52.275,22.875 69.175,22.875 74.088,27.788 76.631,27.788 77.266,28.423 87.172,28.423 88.95,26.645 88.95,24.867 89.331,24.486 89.331,22.441 90.08,21.692 ; 66.611,14.199 66.611,17.488 65.074,19.025 ; 67.111,46.824 67.111,50.113 65.574,51.65 ; v1(71.286,73.511) 71.286,75.289 ; 71.286,79.099 71.286,81.118 v1(71.299,81.131) ; v1(71.411,8.611) 71.411,10.389 ; 71.411,14.199 71.411,16.218 v1(71.424,16.231) ; v1(71.911,41.236) 71.911,43.014 ; 71.911,46.824 71.911,48.843 v1(71.924,48.856) ; 72.442,70.844 72.442,71.987 74.22,73.765 74.22,75.035 72.696,76.559 71.286,76.559 71.261,77.854 73.95,77.854 ; 72.567,5.944 72.567,7.087 74.345,8.865 74.345,10.135 72.821,11.659 71.411,11.659 71.386,12.954 74.075,12.954 ; 73.067,38.569 73.067,39.712 74.845,41.49 74.845,42.76 73.321,44.284 71.911,44.284 71.886,45.579 74.575,45.579 ; 75.236,89.386 75.236,86.592 76.887,84.941 75.871,83.925 64.949,83.925 ; 75.361,24.486 75.361,21.692 77.012,20.041 75.996,19.025 65.074,19.025 ; 75.861,57.111 75.861,54.317 77.512,52.666 76.496,51.65 65.574,51.65 ; 76.375,77.957 77.032,77.957 78.428,79.353 78.665,79.353 78.665,81.512 79.3,82.147 79.3,84.814 79.173,84.941 79.554,85.322 ; 76.5,13.057 77.157,13.057 78.553,14.453 78.79,14.453 78.79,16.612 79.425,17.247 79.425,19.914 79.298,20.041 79.679,20.422 ; 77,45.682 77.657,45.682 79.053,47.078 79.29,47.078 79.29,49.237 79.925,49.872 79.925,52.539 79.798,52.666 80.179,53.047 ; 77.522,89.386 77.776,89.64 81.078,89.64 ; 77.647,24.486 77.901,24.74 81.203,24.74 ; 78.147,57.111 78.401,57.365 81.703,57.365 ; v1(78.538,86.973) 78.919,87.354 81.078,87.354 81.078,86.846 79.554,85.322 ; v1(78.663,22.073) 79.044,22.454 81.203,22.454 81.203,21.946 79.679,20.422 ; 78.665,77.067 81.713,77.067 ; 78.79,12.167 81.838,12.167 ; v1(79.163,54.698) 79.544,55.079 81.703,55.079 81.703,54.571 80.179,53.047 ; 79.29,44.792 82.338,44.792 ; v1@84.126,79.988 84.38,79.734 86.412,79.734 85.155,80.991 85.155,82.782 ; v1@84.251,15.088 84.505,14.834 86.537,14.834 85.28,16.091 85.28,17.882 ; v1(84.6,89.6) 86.706,89.6 86.92,89.386 85.155,87.621 85.155,86.592 86.666,86.592 87.936,85.322 ; v1(84.725,24.7) 86.831,24.7 87.045,24.486 85.28,22.721 85.28,21.692 86.791,21.692 88.061,20.422 ; v1@84.751,47.713 85.005,47.459 87.037,47.459 85.78,48.716 85.78,50.507 ; 85.155,84.052 83.491,84.052 81.586,82.147 81.586,79.48 82.856,79.48 85.777,76.559 85.777,75.38 87.207,73.95 87.207,71.568 87.382,71.568 88.075,70.875 v1(90.85,70.875) ; 85.155,85.322 79.554,85.322 ; v1(85.225,57.325) 87.331,57.325 87.545,57.111 85.78,55.346 85.78,54.317 87.291,54.317 88.561,53.047 ; 85.28,19.152 83.616,19.152 81.711,17.247 81.711,14.58 82.981,14.58 85.902,11.659 85.902,10.48 87.332,9.05 87.332,6.668 87.507,6.668 88.2,5.975 v1(90.975,5.975) ; 85.28,20.422 79.679,20.422 ; 85.78,51.777 84.116,51.777 82.211,49.872 82.211,47.205 83.481,47.205 86.402,44.284 86.402,43.105 87.832,41.675 87.832,39.293 88.007,39.293 88.7,38.6 v1(91.475,38.6) ; 85.78,53.047 80.179,53.047 ; 89.493,73.95 95.343,73.95 95.575,74.182 95.719,74.182 ; 89.618,9.05 95.468,9.05 95.7,9.282 95.844,9.282 ; 89.955,82.782 90.857,82.782 91.873,81.766 93.651,81.766 95.2,80.217 v1(95.2,79.4) ; 89.955,84.052 93.651,84.052 ; 89.955,85.322 87.936,85.322 ; 90.08,17.882 90.982,17.882 91.998,16.866 93.776,16.866 95.325,15.317 v1(95.325,14.5) ; 90.08,19.152 93.776,19.152 ; 90.08,20.422 88.061,20.422 ; 90.118,41.675 95.968,41.675 96.2,41.907 96.344,41.907 ; 90.58,50.507 91.482,50.507 92.498,49.491 94.276,49.491 95.825,47.942 v1(95.825,47.125) ; 90.58,51.777 94.276,51.777 ; 90.58,53.047 88.561,53.047 ; v1(91.425,89.15) 92.225,88.35 92.225,85.478 93.651,84.052 ; v1(91.55,24.25) 92.35,23.45 92.35,20.578 93.776,19.152 ; v1(92.05,56.875) 92.85,56.075 92.85,53.203 94.276,51.777 ; v1(93.275,77.875) 91.416,79.734 88.698,79.734 87.936,80.496 87.936,85.322 ; v1(93.4,12.975) 91.541,14.834 88.823,14.834 88.061,15.596 88.061,20.422 ; v1(93.9,45.6) 92.041,47.459 89.323,47.459 88.561,48.221 88.561,53.047 ; 95.575,76.468 96.575,77.468 96.575,81.925 94.448,84.052 93.651,84.052 ; 95.7,11.568 96.7,12.568 96.7,17.025 94.573,19.152 93.776,19.152 ; 96.2,44.193 97.2,45.193 97.2,49.65 95.073,51.777 94.276,51.777
  Bottom Layer w0.6: 5.322,31.586 5.322,37.757 8.925,41.36 ; 7.775,31.275 48.175,31.275 50.825,33.925 50.825,61.6 52.675,63.45 94.975,63.45 98.575,59.85 98.575,34.775 96.975,33.175 94.72,33.175 93.71,34.185 93.71,36.85 v1@91.96,38.6 ; 7.986,69.353 7.986,73.996 8.575,74.585 v1(22.236,74.611) ; 8.025,81.215 8.787,81.215 v1(10.184,79.818) 11.454,81.088 13.486,81.088 ; 8.025,83.501 9.041,83.501 v1(10.184,84.644) 12.47,84.644 13.486,83.628 ; 8.3,47.99 9.062,47.99 v1(10.459,46.593) 11.729,47.863 13.761,47.863 ; 8.3,50.276 9.316,50.276 v1(10.459,51.419) 12.745,51.419 13.761,50.403 ; 8.35,66.775 8.275,66.7 8.275,63.875 47.975,63.875 49.45,62.4 49.45,35.375 47.125,33.05 45.95,33.05 44.31,34.69 44.31,37 v1@42.56,38.75 ; 8.575,77.125 v1(13.827,77.572) 14.422,78.167 18.185,78.167 18.185,90.7 ; 8.7,76.875 7.025,76.875 4.525,74.375 4.525,62.125 8.635,58.015 16.025,58.015 17.82,58.015 18.36,57.475 18.46,57.475 ; 8.85,41.36 v1(22.511,41.386) ; 8.85,43.9 v1(14.102,44.347) 14.697,44.942 18.46,44.942 18.46,57.475 ; v1(11.55,88.8) 15.65,88.8 ; v1(11.825,55.575) 15.925,55.575 ; 15.75,91.24 17.545,91.24 18.085,90.7 18.185,90.7 ; 15.75,93.78 15.92,93.95 37.175,93.95 38.075,93.05 38.632,93.05 38.632,85.152 v1(34.949,81.469) 34.187,82.231 v1(22.249,82.231) 22.249,79.945 20.471,78.167 ; 16.025,60.555 16.195,60.725 37.45,60.725 38.35,59.825 38.907,59.825 38.907,51.927 v1(35.224,48.244) 34.462,49.006 v1(22.524,49.006) 22.524,46.72 20.746,44.942 ; v1(20.979,69.658) 21.137,69.5 23.582,69.5 23.582,70.407 25.754,72.579 26.186,72.579 ; v1(21.254,36.433) 21.412,36.275 23.857,36.275 23.857,37.182 26.029,39.354 26.461,39.354 ; v1(25.297,75.119) 25.805,74.611 31.774,74.611 ; v1(25.572,41.894) 26.08,41.386 32.049,41.386 ; 25.868,69.075 27.785,69.075 28.98,67.88 35.23,67.88 41.8,74.45 41.8,79.125 46.15,83.475 ; 25.868,69.5 28.382,69.5 28.407,69.475 ; 26.143,35.85 28.06,35.85 29.255,34.655 35.505,34.655 42.075,41.225 42.075,45.9 46.425,50.25 ; 26.143,36.275 28.657,36.275 28.682,36.25 ; 28.472,72.579 31.266,69.785 ; 28.747,39.354 31.541,36.56 ; 34.06,74.611 36.818,74.611 36.932,74.725 ; 34.335,41.386 37.093,41.386 37.207,41.5 ; v1(35.55,90.7) 18.185,90.7 ; v1(35.825,57.475) 18.46,57.475 ; 39.218,74.725 39.218,79.909 43.81,84.458 44.925,85.573 44.925,87.98 44.645,87.98 v1(42.375,90.25) ; 39.493,41.5 39.493,46.684 44.085,51.233 45.2,52.348 45.2,54.755 44.92,54.755 v1(42.65,57.025) ; v1@42.285,71.975 44.035,70.225 44.035,66.915 48.985,66.915 49.251,66.915 50.672,68.336 ; 43.985,3.95 43.985,1.765 44.55,1.2 48.2,1.2 50,3 50.68,3 ; v1(44.225,78.975) 44.225,78.95 45.225,77.95 45.225,71.575 46.575,70.225 48.3,70.225 53.775,75.7 57.525,75.7 ; v1(44.5,45.75) 44.5,45.725 45.5,44.725 45.5,38.35 46.85,37 ; 44.925,90.52 45.755,90.52 46.625,89.65 46.625,83.95 46.15,83.475 ; 45.2,57.295 46.03,57.295 46.9,56.425 46.9,50.725 46.425,50.25 ; v1(46.15,80.5) 46.15,83.475 ; v1(46.425,47.275) 46.425,50.25 ; 53.212,68.336 57.625,72.749 57.625,73.485 v1(71.286,73.511) ; 53.22,3 53.22,4.055 57.75,8.585 v1(71.411,8.611) ; 56.247,33.736 56.247,36.672 58.25,38.675 58.25,41.21 v1(71.911,41.236) ; 57.075,80.115 57.837,80.115 v1(59.234,78.718) 60.504,79.988 62.536,79.988 ; 57.075,82.401 58.091,82.401 v1(59.234,83.544) 61.52,83.544 62.536,82.528 ; 57.2,15.215 57.962,15.215 v1(59.359,13.818) 60.629,15.088 62.661,15.088 ; 57.2,17.501 58.216,17.501 v1(59.359,18.644) 61.645,18.644 62.661,17.628 ; 57.625,76.025 v1(62.877,76.472) 63.472,77.067 67.235,77.067 67.235,89.6 ; 57.7,47.84 58.462,47.84 v1(59.859,46.443) 61.129,47.713 63.161,47.713 ; 57.7,50.126 58.716,50.126 v1(59.859,51.269) 62.145,51.269 63.161,50.253 ; 57.75,11.125 v1(63.002,11.572) 63.597,12.167 67.36,12.167 67.36,24.7 ; 59,33.875 61.075,31.8 95.95,31.8 98.35,29.4 98.35,3 97.525,2.175 97.525,1.725 94.35,1.725 93.21,2.865 93.21,4.225 v1@91.46,5.975 ; v1(60.6,87.7) 64.7,87.7 ; v1(60.725,22.8) 64.825,22.8 ; v1(61.225,55.425) 65.325,55.425 ; 64.8,90.14 66.595,90.14 67.135,89.6 67.235,89.6 ; 64.8,92.68 64.97,92.85 86.225,92.85 87.125,91.95 87.682,91.95 87.682,84.052 v1(83.999,80.369) 83.237,81.131 v1(71.299,81.131) 71.299,78.845 69.521,77.067 ; 64.925,27.78 65.095,27.95 86.35,27.95 87.25,27.05 87.807,27.05 87.807,19.152 v1(84.124,15.469) 83.362,16.231 v1(71.424,16.231) 71.424,13.945 69.646,12.167 ; 65.425,57.865 67.22,57.865 67.76,57.325 67.86,57.325 ; 65.425,60.405 65.595,60.575 86.85,60.575 87.75,59.675 88.307,59.675 88.307,51.777 v1(84.624,48.094) 83.862,48.856 v1(71.924,48.856) 71.924,46.57 70.146,44.792 ; v1(70.029,68.558) 70.187,68.4 72.632,68.4 72.632,69.307 74.804,71.479 75.236,71.479 ; v1(70.154,3.658) 70.312,3.5 72.757,3.5 72.757,4.407 74.929,6.579 75.361,6.579 ; v1(70.654,36.283) 70.812,36.125 73.257,36.125 73.257,37.032 75.429,39.204 75.861,39.204 ; v1(74.347,74.019) 74.855,73.511 80.824,73.511 ; v1(74.472,9.119) 74.98,8.611 80.949,8.611 ; 74.918,67.975 76.835,67.975 78.03,66.78 84.28,66.78 90.85,73.35 90.85,78.025 95.2,82.375 ; 74.918,68.4 77.432,68.4 77.457,68.375 ; v1(74.972,41.744) 75.48,41.236 81.449,41.236 ; 75.043,3.075 76.96,3.075 78.155,1.88 84.405,1.88 90.975,8.45 90.975,13.125 95.325,17.475 ; 75.043,3.5 77.557,3.5 77.582,3.475 ; 75.543,35.7 77.46,35.7 78.655,34.505 84.905,34.505 91.475,41.075 91.475,45.75 95.825,50.1 ; 75.543,36.125 78.057,36.125 78.082,36.1 ; 77.522,71.479 80.316,68.685 ; 77.647,6.579 80.441,3.785 ; 78.147,39.204 80.941,36.41 ; 83.11,73.511 85.868,73.511 85.982,73.625 ; 83.235,8.611 85.993,8.611 86.107,8.725 ; 83.735,41.236 86.493,41.236 86.607,41.35 ; v1(84.6,89.6) 67.235,89.6 ; v1(84.725,24.7) 67.36,24.7 ; v1(85.225,57.325) 67.86,57.325 ; 88.268,73.625 88.268,78.809 92.86,83.358 93.975,84.473 93.975,86.88 93.695,86.88 v1(91.425,89.15) ; 88.393,8.725 88.393,13.909 92.985,18.458 94.1,19.573 94.1,21.98 93.82,21.98 v1(91.55,24.25) ; 88.893,41.35 88.893,46.534 93.485,51.083 94.6,52.198 94.6,54.605 94.32,54.605 v1(92.05,56.875) ; v1@91.335,70.875 93.085,69.125 ; v1(93.275,77.875) 93.275,77.85 94.275,76.85 94.275,70.475 95.625,69.125 ; v1(93.4,12.975) 93.4,12.95 94.4,11.95 94.4,5.575 95.75,4.225 ; v1(93.9,45.6) 93.9,45.575 94.9,44.575 94.9,38.2 96.25,36.85 ; 93.975,89.42 94.805,89.42 95.675,88.55 95.675,82.85 95.2,82.375 ; 94.1,24.52 94.93,24.52 95.8,23.65 95.8,17.95 95.325,17.475 ; 94.6,57.145 95.43,57.145 96.3,56.275 96.3,50.575 95.825,50.1 ; v1(95.2,79.4) 95.2,82.375 ; v1(95.325,14.5) 95.325,17.475 ; v1(95.825,47.125) 95.825,50.1 ; 67.36,24.7 67.26,24.7 66.72,25.24 64.925,25.24 57.26,25.24 53.3,29.2 53.3,40.75 56.3,43.75 58.25,43.75 v1(63.502,44.197) 64.097,44.792 67.86,44.792 67.86,57.325

## Keep-outs
Keep-Out Layer:
  lines w0.254: 0,0 -0.025,0.025 -0.025,100 100,100 100,0 99.97,0.03 0.03,0.03

## Silkscreen, mask and mechanical layers (free items; w line width, h text height)
Top Overlay:
  text "E5" at 2.05,92.525 h3
  text "E6" at 50.575,91.4 h3
  text "GND" at 8.3,91.1 h1
  text "GND" at 57.35,90 h1
  text "-vcc" at 6.875,89.575 h1
  text "-vcc" at 55.925,88.475 h1
  text "E3" at 51.95,58.9 h3
  text "E4" at 2.8,58.2 h3
  text "GND" at 8.575,57.875 h1
  text "GND" at 57.975,57.725 h1
  text "-vcc" at 7.15,56.35 h1
  text "-vcc" at 56.55,56.2 h1
  text "E2" at 50.95,25.55 h3
  text "E1" at 2.425,25.4 h3
  text "GND" at 57.475,25.1 h1
  text "GND" at 8.25,24.825 h1
  text "-vcc" at 56.05,23.575 h1
  text "-vcc" at 6.825,23.3 h1